# EAGLE board And_gate_using_Transister' (EAGLE 9.6.2)
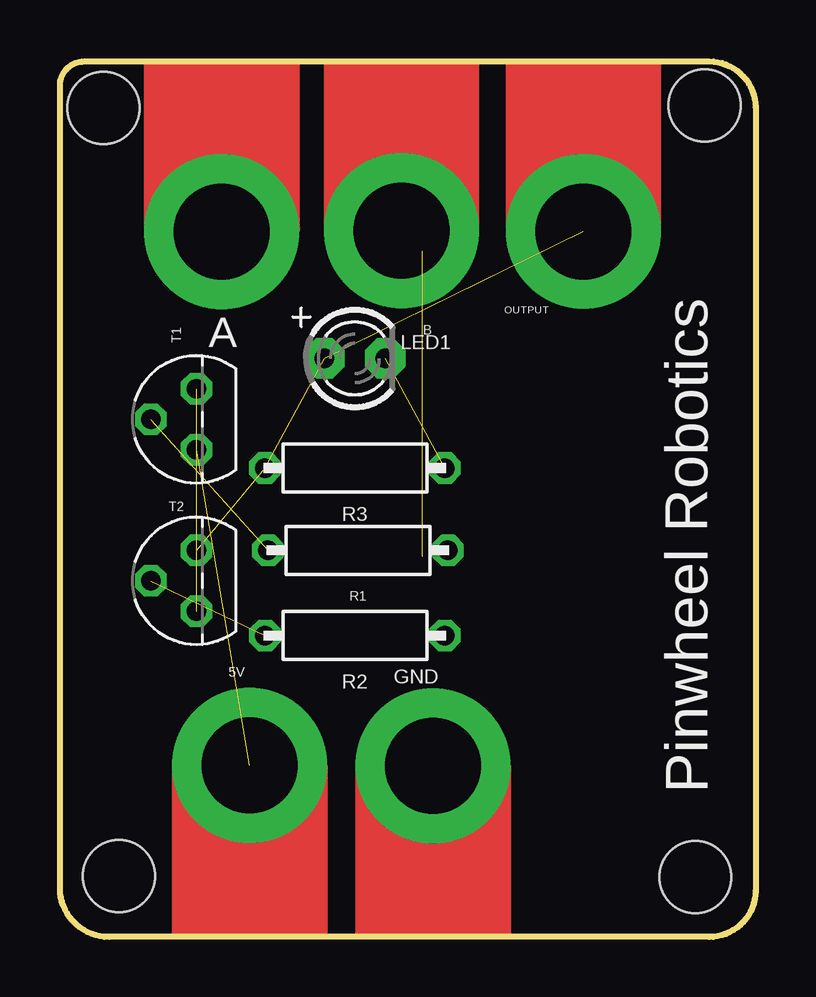
[diagram p0: board, top side]
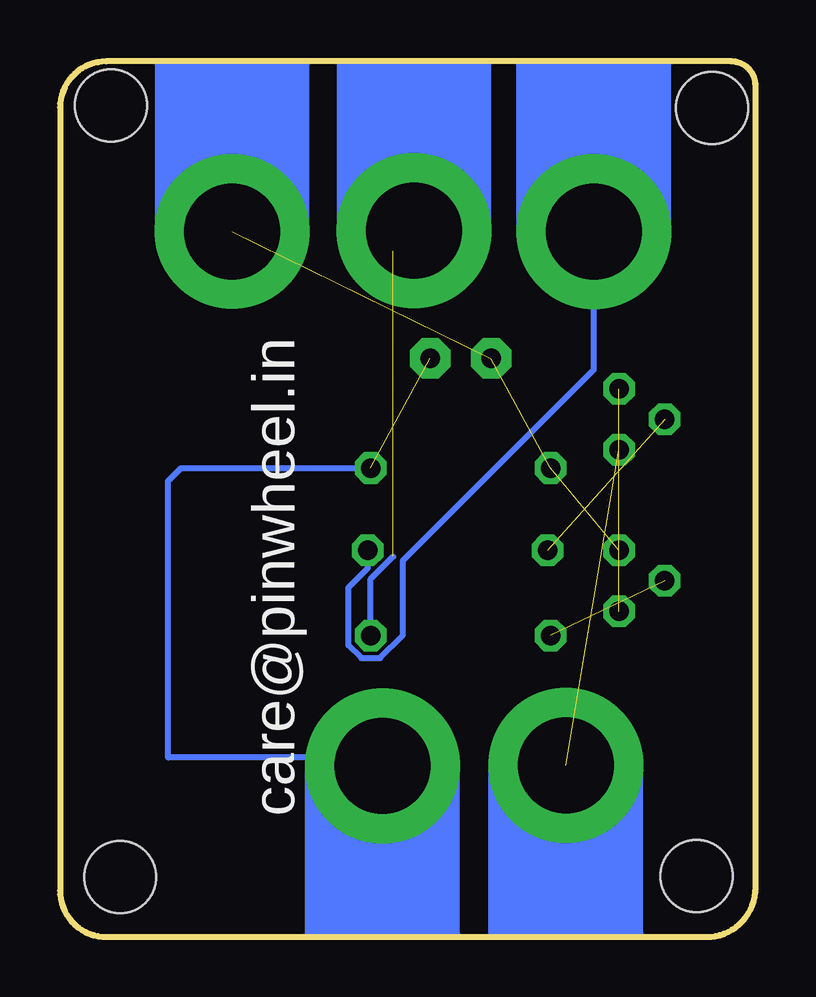
[diagram p1: board, bottom side, seen from below]

Size 29 x 36.5 mm. Coordinates in mm from the lower left corner, seen from the top.
Outline: 29,34.57 29,1.94 arc-90 27.06,0 2.05,0 arc-90 0,2.05 0,35.48 arc-90 1.02,36.5 27.07,36.5 arc-90 29,34.57
Copper layers (1*16): Top 0.035mm / dielectric 1.5mm / Bottom 0.035mm
Design rules "default *": minimum track width 10mil, minimum drill 0.35mm, track to track 6mil, track to pad 6mil, pad to pad 6mil, via to via 6mil, smd to smd 6mil, copper to edge 40mil, drill to drill 6mil, minimum pad ring 10mil, minimum via ring 8mil, stop-mask expansion 4mil, vias tented up to drill 0mil, thermal gap 10mil
Holes 3 mm at 26.49,2.5 26.88,34.66 1.81,34.56 2.46,2.54

## Footprints (pad centres in the part's own frame; a part is rotated, then mirrored left to right if it is on the bottom)
MICROBIT_PAD = drill 4 pad 6.452: PAD 0,0
LED3MM = drill 0.813 pad 1.676 octagon: A -1.27,0; K 1.27,0
R0207/7 = drill 0.813 octagon: 1 -3.75,0; 2 3.75,0
TO92 = drill 0.813 octagon: 1 1.27,0; 2 0,1.905; 3 -1.27,0

## Placement (x,y rotation side)
5V  MICROBIT_PAD  [MICROBIT_PAD]  7.91,7.16 0 top
A  MICROBIT_PAD  [MICROBIT_PAD]  6.74,29.4 180 top
B  MICROBIT_PAD  [MICROBIT_PAD]  14.24,29.45 180 top
GND  MICROBIT_PAD  [MICROBIT_PAD]  15.56,7.14 0 top
LED1  [LED3MM]  12.29,24.12 0 top
OUTPUT  MICROBIT_PAD  [MICROBIT_PAD]  21.82,29.41 180 top
R1  [R0207/7]  12.42,16.12 180 top
R2  [R0207/7]  12.29,12.56 180 top
R3  [R0207/7]  12.29,19.55 180 top
T1  BC547  [TO92]  5.69,21.58 90 top
T2  BC547  [TO92]  5.69,14.85 90 top

## Library data of the parts
5V A B GND OUTPUT = microbit
LED1 = adafruit
R1-R3 = we-rcl
T1 T2 = transistor-neu-to92

## Nets
5V: 5V.PAD T1.3
GND: GND.PAD LED1.K R3.1
N$1: R2.2 T2.2
N$2: T1.1 T2.3
N$3: LED1.A OUTPUT.PAD R3.2 T2.1
N$4: R1.2 T1.2
N$6: A.PAD R1.1
N$7: B.PAD R2.1

## Tracks (layer width: path | path; a pad name or v marks a point on that pad's centre or on a via)
5V  (1 unrouted)
GND  (1 unrouted)
  Bottom 0.254: GND.PAD 18.12,7.14 18.46,7.48 24.48,7.48 24.5,7.5 24.5,19 23.95,19.55 R3.1
N$1  (1 unrouted)
N$2  (1 unrouted)
N$3  (3 unrouted)
N$4  (1 unrouted)
N$6
  Bottom 0.254: R1.1 16.17,15.37 16.98,14.55 16.98,12.18 16.43,11.62 15.66,11.62 14.7,12.58 14.7,15.69 6.74,23.64 A.PAD
N$7  (1 unrouted)
  Bottom 0.254: R2.1 16.05,14.92 15.11,15.86 | 15.11,28.59 B.PAD

## Text on the board
tPlace: Pinwheel Robotics
bPlace: care@pinwheel.in